# Altium PCB STC15F104_IR_RelayControl.PcbDoc
Units mil, origin at the board's own origin, x right, y up, seen from the top; angles counter-clockwise.
Board outline 2881 x 626 mil, 2 copper layers (Top Layer, Bottom Layer); 18 components, 18 nets, 61 pads, 22 vias.
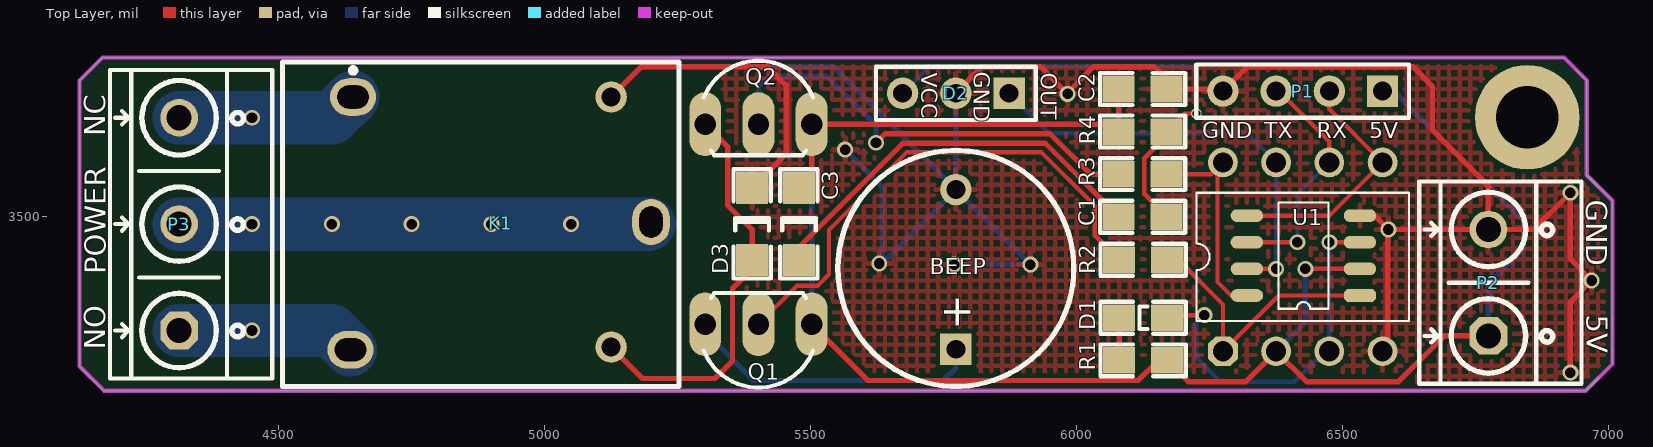
[diagram p0: Top Layer view]
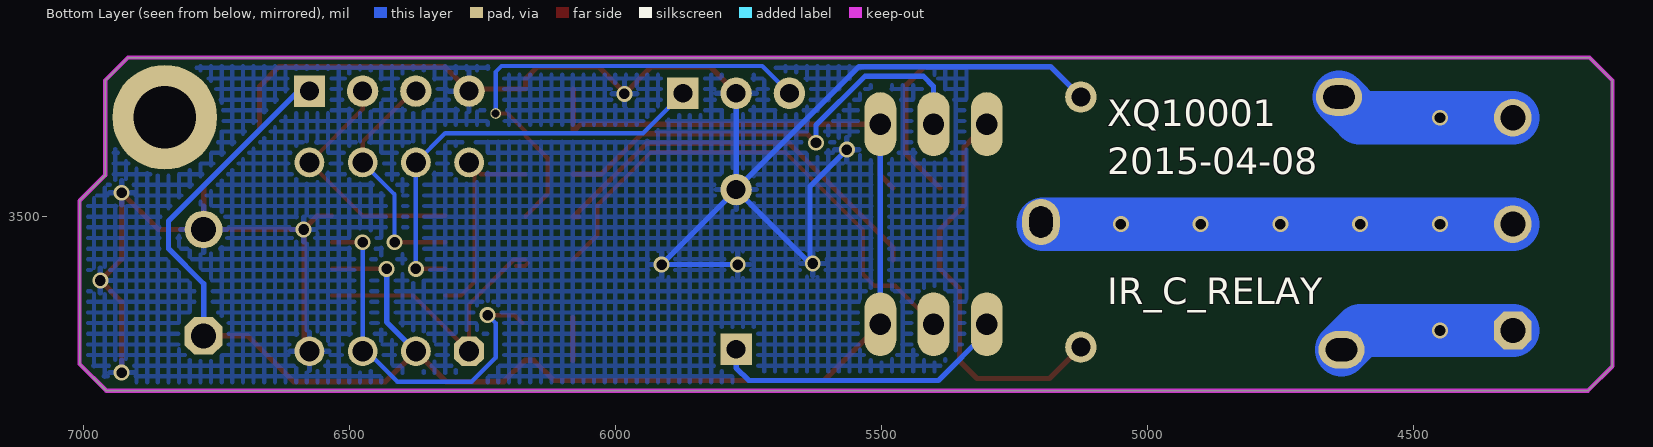
[diagram p1: Bottom Layer view, seen from below]

## Layer stack, top to bottom
Top Layer: signal copper 1.4
Dielectric: dielectric 12.6, FR-4, Dk 4.8
Bottom Layer: signal copper 1.4

## Board outline
4126,3219 4172,3173 6957,3173 7007,3223 7007,3530 6959,3578 6959,3756 6916,3799 4169,3799 4126,3756

## Design rules (kind name [scope] priority, off if disabled: settings)
Clearance [All] p1: gap=8
FabricationTestPointUsage TestPointUsage [All] p1: valid=0 allowmultiple=FALSE
FabricationTestpoint Testpoint [All] p1: side=3 testpointundercomponent=TRUE minsize=40 maxsize=100 preferedsize=60 minholesize=0 maxholesize=40 preferedholesize=32 testpointgrid=1 allowsidetop=TRUE allowsidebottom=TRUE usegrid=TRUE gridtolerance=0.01
HoleSize [All] p1: absolutevalues=TRUE maxlimit=200 minlimit=1 maxpercent=80.000 minpercent=20.000
PolygonConnect [All] p1: connectstyle=Relief reliefconductorwidth=10 reliefentries=4 polygonreliefangle="90 Angle"
RoutingVias [All] p1: holewidth=12 width=20 viastyle="Through Hole" minholewidth=12 minwidth=20 maxholewidth=30 maxwidth=50
SMDNeckDown [All] p1: percent=80.000
SilkToSilkClearance [All] p1: silktosilkclearance=0
SilkscreenOverComponentPads [All] p1: minsilkscreentomaskgap=0
SolderMaskExpansion [All] p1: expansion=4
Width [All] p1: maxlimit=100 minlimit=8 preferedwidth=8
23 further rules are at their usual default settings.

## Components (designator, comment, footprint, x,y, rotation, side; value= is the part's Value field where it differs from the comment)
BEEP "Buzzer" Buzzer 5773,3401 r90 top (schematic designator LS1)
C1 "Cap" 0805 6169,3500 r180 top
C2 "Cap" 0805 6079,3740 r0 top
C3 "Cap Pol1" C1206A 5478,3554 r270 top locked
D1 "LED-2P" C0805 6080,3310 r0 top
D2 "D38" D1838-H3 5873,3732 r180 top
D3 "1N4148" C1206A 5390,3554 r270 top locked
K1 "Relay_5V_5P" RELAY_5V_5P 4910,3490 r270 top locked
P1 "Header 4" HDR1X4 6575,3736 r180 top
P2 "Header 2" KF301-2P 6774,3276 r90 top
P3 "Header 3" KF301-3P 4313,3486 r90 top
Q1 "S8550" TO92 5402,3298 r180 top locked
Q2 "S8050" TO92 5402,3674 r0 top locked
R1 "Res2" 0805 6170,3230 r180 top
R2 "Res2" 0805 6080,3419 r0 top
R3 "Res2" 0805 6079,3580 r0 top
R4 "Res2" 0805 6079,3660 r0 top
U1 "STC15F101W_SOP8_DIP8" DIP8_SOP8 6275,3247 r90 top

## Footprints (in the part's own frame and the unit in brackets; to place one, negate y for a bottom-side part, rotate by r counter-clockwise, add the part's x,y. Pads: shape width x height; smd on the part's side, far side on the other; paste and mask are expansions set on the pad)
0805 [mil]
  rect 60x50 smd: 1(0,0) 2(90,0)
  silkscreen extent -35,-30 125,30
Buzzer [mm]
  rect 1.5x1.5 hole 0.9: 1(-3.81,0)
  round 1.5 hole 0.9: 2(3.81,0)
  silkscreen extent -5.58,-5.63 5.68,5.63
C0805 [mil]
  rect 60x50 smd: 1(0,0) 2(90,0)
  silkscreen extent -35,-30 125,30
C1206A [mil] "Chip Capacitor; Body 3.2 x 1.6 mm (LxW typ)"
  rect 60x60 smd: 1(0,0) 2(135,0)
  silkscreen extent -35,-35 170,35
D1838-H3 [mm]
  rect 1.5x1.5 hole 0.9: 1(0,0)
  round 1.5 hole 0.9: 2(2.54,0) 3(5.08,0)
  silkscreen extent -1.27,-1.27 6.35,1.27
DIP8_SOP8 [mil]
  oct 56x56 hole 38: 1(0,0)
  oct 24x61 smd: 1(105,-257.6)
  round 56 hole 38: 2(0,-100) 3(0,-200) 4(0,-300) 5(355,-300) 6(355,-200) 7(355,-100) 8(355,0)
  oval 24x61 smd: 2(155,-257.6) 3(205,-257.6) 4(255,-257.6) 5(255,-45) 6(205,-45) 7(155,-45) 8(105,-45)
  Top Layer lines w8: 0,0 105,-105 105,-257.6 ; 355,0 345,10 130,10 105,-15 105,-45 ; 155,-45 155,-100 ; 255,-45 255,-200 355,-300 ; 205,-140 205,-45 ; 155,-155 155,-257.6 ; 205,-200 205,-257.6 ; 255,-257.6 255,-285 ; 0,-300 10,-310 ; 205,-45 205,-45
  Top Layer lines w10: 255,-285 230,-310 229,-310 10,-310
  Bottom Layer lines w8: 155,-100 355,-100 ; 205,-140 295,-140 355,-200 ; 0,-200 205,-200
  Bottom Layer lines w10: 0,-100 55,-155 155,-155
  silkscreen extent 57,-350 298,50
HDR1X4 [mm] "Connector; Header; 4 Position"
  rect 1.5x1.5 hole 0.9: 1(0,0)
  round 1.5 hole 0.9: 2(2.54,0) 3(5.08,0) 4(7.62,0)
  silkscreen extent -1.27,-1.27 8.89,1.27
KF301-2P [mm]
  oct 1.8x1.8 hole 1.2: 1(0,0)
  round 1.8 hole 1.2: 2(5.08,0)
  silkscreen extent -2.29,-4.44 7.37,3.3
KF301-3P [mm]
  oct 1.8x1.8 hole 1.2: 1(-5.08,0)
  round 1.8 hole 1.2: 2(0,0) 3(5.08,0)
  silkscreen extent -7.37,-4.45 7.37,3.3
RELAY_5V_5P [mm] "15"
  oval 1.8x2.2 hole 1.1 slot 1.5 at 90 deg: 1(-5.969,-6.858) 2(6.096,-6.985)
  round 1.5 hole 0.9: 3(5.969,5.461) 5(-5.969,5.461)
  oval 2.2x1.8 hole 1.5 slot 1.1 at 90 deg: 4(0,7.366)
  silkscreen extent -7.64,-10.22 7.85,8.7
TO92 [mil]
  oval 60x120 hole 40: 1(-100,0) 2(0,0) 3(100,0)
  silkscreen extent -103,-58 103,119

## Part data
BEEP: "蜂?"
C1 C2: "Capacitor"
C3: "Polarized Capacitor (Radial)"
D1: "发?"
D2: "一体化万Ä"
D3: "快速开关二极管"
K1: "继电器"
P1: "Header, 4-Pin"
P2: "Header, 2-Pin"
P3: "Header, 3-Pin"
Q1: "PNP 三?"
Q2: "NPN 三?"
R1 R2 R3 R4: "Resistor"

## Free pads (board coordinates)
  round 20 hole 15: 0(6225,3694)
  round 196.85 hole 118.11: 1(6847,3687)

## Via types
v1: diameter 30, hole 20, Top Layer to Bottom Layer, 22 vias

## Nets (pads, with @x,y where several pads share a name; then routed paths per layer and width w, separated by ;. In a path a pad name is that pad's centre, name@x,y a point inside that pad or via, vN(x,y) a via of type N, cw(c..) or ccw(c..) an arc to the next point about the centre after c; other vN are vias at no path point)
GND: BEEP.2 C2.2 D2.2 D3.1 K1.5 P1.4 P2.2 U1.4 | length 4440.4
  Top Layer w10: K1.5 5182,3782 5419,3782 5454,3747 5454,3618 D3.1 ; D2.2@5772.5,3732.5 5822.06,3782.06 5931.94,3782.06 v1(5983,3731) ; v1@5983,3733 6032.06,3782.06 6145.94,3782.06 6169,3759 C2.2 6276,3740 6260,3756 P1.4 6321.06,3782.06 6631.94,3782.06 6669,3745 6669,3663 6774,3558 P2.2 ; v1(6586,3476) P2.2 ; v1(6928,3207) 6928,3340 v1(6968,3380) 6928,3420 v1(6928,3545) 6859,3476 P2.2
  Bottom Layer w10: K1.5 5182.06,3782.06 5541.94,3782.06 BEEP.2 ; v1(5565,3626) 5634,3557 5634,3412 BEEP.2 ; v1(5770,3410) v1(5913,3410) 5773,3550 BEEP.2 ; D2.2 BEEP.2
  other v1: 5629,3412
NC: K1.1 P3.3 | length 343.2
  Bottom Layer w100: P3.3 4601,3686 K1.1
  other v1: 4450,3686
NetC1_1: C1.1 D2.3 pad.0 R4.2 | length 920.6
  Top Layer w8: C1.1 6169,3501 6127,3543 6127,3609.97 6169,3651.97 R4.2 6203,3694 pad.0
  Bottom Layer w8: D2.3 5724.06,3783.06 6213.94,3783.06 6225,3772 pad.0
NetC1_2: C1.2 C3.2 | length 771.7
  Top Layer w10: C3.2 5478,3442.54 5673.46,3638 5941,3638 C1.2 C1.2@6069.96,3500
NetD1_1: D1.1 R1.2 | length 80
  Top Layer w10: R1.2 D1.1
NetD3_2: D3.2 K1.3 Q2.1 | length 772.1
  Top Layer w10: K1.3 5184,3196 5320,3196 5353,3229 5353,3365 5390,3402 D3.2 5390,3475.62 5344,3521.62 5344,3632 Q2.1
  Bottom Layer w10: Q2.1 Q2.1@5311.19,3674
NetLS1_1: BEEP.1 Q1.3 | length 568.6
  Bottom Layer w10: Q1.3 5302,3283 5393,3192 5749,3192 5773,3216 BEEP.1
NetQ1_2: Q1.2 R2.1 | length 977.2
  Top Layer w8: Q1.2 5474,3370 5513,3370 5534.75,3391.75 5534.75,3475.25 5680.5,3621 5933.96,3621 6034,3520.96 6034,3465 R2.1
NetQ2_2: Q2.2 R3.1 | length 882.5
  Top Layer w10: Q2.2 Q2.2@5414,3662 ; v1(5623,3639) 5640,3656 5950,3656 6026,3580 R3.1
  Bottom Layer w10: Q2.2 5402,3745 5421.06,3764.06 5530.94,3764.06 5623,3672 v1(5623,3639)
NO: K1.2 P3.1 | length 336.9
  Bottom Layer w100: P3.1 4599,3286 K1.2
  other v1: 4450,3286
P3.0: P1.2 U1.5 | length 175.4
  Top Layer w8: P1.2 6475,3702 U1.5@6575,3602
P3.1: P1.3 U1.6 | length 176.9
  Top Layer w8: P1.3@6377.5,3738.5 6475,3641 U1.6@6475,3602
  other v1: 6415,3452
P3.2: D2.1 U1.7 | length 555.8
  Bottom Layer w8: D2.1 5948,3657 6320,3657 U1.7@6375,3602
  other v1: 6375,3402
P3.3: R3.2 U1.8 | length 115.1
  Top Layer w8: R3.2 6253,3580 6265,3592 U1.8@6275,3602
P3.4: R2.2 U1.1 | length 252.6
  Top Layer w8: R2.2@6164.19,3413.19 6170,3407.37 R2.2@6186.63,3407.37 ; R2.2 6191,3419 6275,3335 U1.1@6275,3247
P3.5: D1.2 U1.3 | length 469.7
  Top Layer w8: D1.2@6175,3300 6190,3315 v1(6240,3315) v1@6240,3325
  Bottom Layer w8: v1@6240,3325 v1(6240,3315) 6225,3300 6225,3235 6270,3190 6410,3190 6467,3247 U1.3@6475,3247
  other v1: 6475,3452
POWER: K1.4 P3.2 | length 888.7
  Bottom Layer w60: K1.4@5196,3486 K1.4
  Bottom Layer w100: P3.2 K1.4@5196,3486
  other v1: 4450,3486 4600,3486 4750,3486 4900,3486 5050,3486
VCC: C2.1 C3.1 P1.1 P2.1 Q1.1 Q2.3 R1.1 R4.1 U1.2 | length 3211.3
  Top Layer w10: C3.1 5502,3578 Q2.3 5955.91,3674 6065,3674 R4.1 C2.1 ; Q1.1 5608,3192 6115.38,3192 6153.38,3230 R1.1 6210,3190 6318,3190 6375,3247 6432.06,3189.94 6605,3189.94 6691.06,3276 P2.1
  Bottom Layer w10: Q1.1 Q2.3 ; P1.1@6575,3741 6591,3741 6840,3492 6840,3440 6774,3374 P2.1
  other v1: 6430,3402

## Polygon pours and split planes (outlines as drawn)
GND on Top Layer "Top Overlay-No Net" (hatched 90Degree grid 20 track 8, remove dead copper, pour order 10): 5335,3800 5335,3173 6956.55,3173 7007,3223 7007,3530 6958.57,3578 6958.57,3756 6915.18,3799 5335,3799
GND on Bottom Layer "Top Overlay-No Net" (hatched 90Degree grid 20 track 8, remove dead copper, pour order 12): 5340,3799 5340,3173 6957.45,3173 7007,3223 7007,3530 6959.43,3578 6959.43,3756 6916.81,3799 5340,3799

## Keep-outs
Keep-Out Layer:
  the board outline again, w7.87

## Silkscreen, mask and mechanical layers (free items; w line width, h text height)
Top Overlay:
  text "NC" at 4174,3651 h40 r90
  text "GND" at 6236,3647 h30
  text "TX" at 6353,3647 h30
  text "RX" at 6451,3647 h30
  text "5V" at 6550,3647 h30
  text "GND" at 6958,3532 h40 r270
  text "POWER" at 4175,3392 h40 r90
  text "5V" at 6959,3316 h40 r270
  text "NO" at 4174,3250 h40 r90
Bottom Overlay:
  text "XQ10001" at 5075,3670 h50
  text "2015-04-08" at 5075,3580 h50
  text "IR_C_RELAY" at 5075,3335 h50
Mechanical 16:
  drawing of 1873 lines, arcs and shapes, not listed
  text "1" at 1427,7465 h70
  text "2" at 4287,7465 h70
  text "3" at 7167,7465 h70
  text "4" at 10037,7465 h70
  text "A" at 75,6559 h70
  text "A" at 11375,6559 h70
  text "B" at 75,4667 h70
  text "B" at 11375,4667 h70
  text "C" at 75,2757 h70
  text "ENGINEER:" at 6850,1300 h45
  text "TITLE:" at 8350,1300 h45
  text "PCB DESIGNER:" at 6850,1005 h45
  text "D" at 75,867 h70
  text "D" at 11375,867 h70
  text "DATE:" at 6850,700 h45
  text "PART NO.:" at 8350,700 h45
  text "REV:" at 10450,700 h45
  text "Altium Limited" at 5550,600 h70
  text ".PRINT_DATE" at 6900,580 h70
  text "12a Rodborough Rd" at 5550,500 h70
  text "Frenchs Forest" at 5550,400 h70
  text "FILE NAME:" at 6850,400 h45
  text "DWG NO:" at 8350,400 h45
  text "SCALE:" at 10450,400 h45
  text "NSW 2086" at 5550,300 h70
  text ".PCB_FILE_NAME_NO_PATH" at 6900,280 h70
  text "1" at 1427,65 h70
  text "2" at 4287,65 h70
  text "3" at 7167,65 h70
  text "4" at 10037,65 h70

## Text inside footprints (layer, text, board x,y; h text height)
BEEP: Top Overlay "+" at 5801,3287 h59.06 r90
D2: Top Overlay "OUT" at 5933,3771 h30 r270; Top Overlay "GND" at 5807,3772 h30 r270; Top Overlay "VCC" at 5708,3771 h30 r270